# Altium PCB CW308T_STM32FSOCKET.PcbDoc
Units mil, origin at the board's own origin, x right, y up, seen from the top; angles counter-clockwise.
Board outline 2060 x 2540 mil, 2 copper layers (Top Layer, Bottom Layer); 22 components, 36 nets, 190 pads, 135 vias.
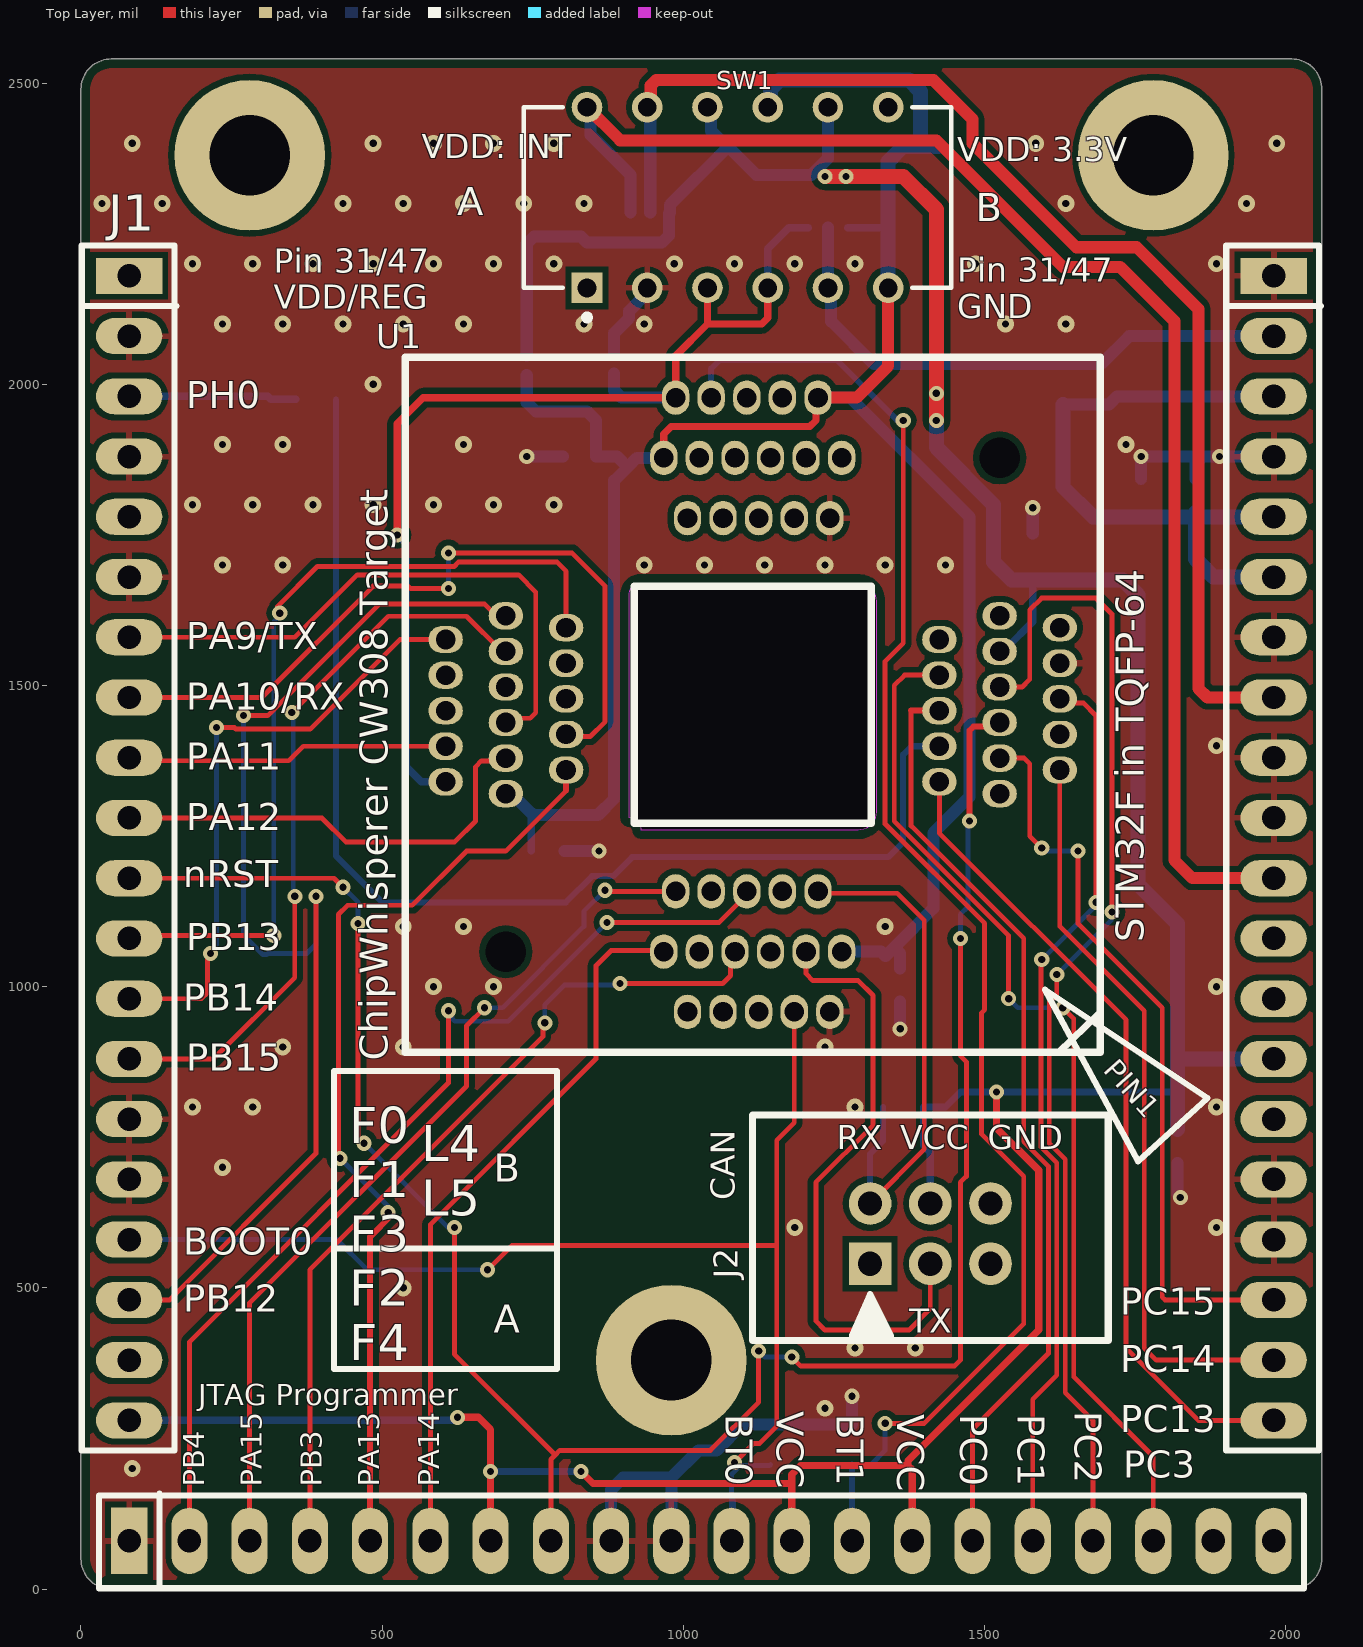
[diagram p0: Top Layer view]
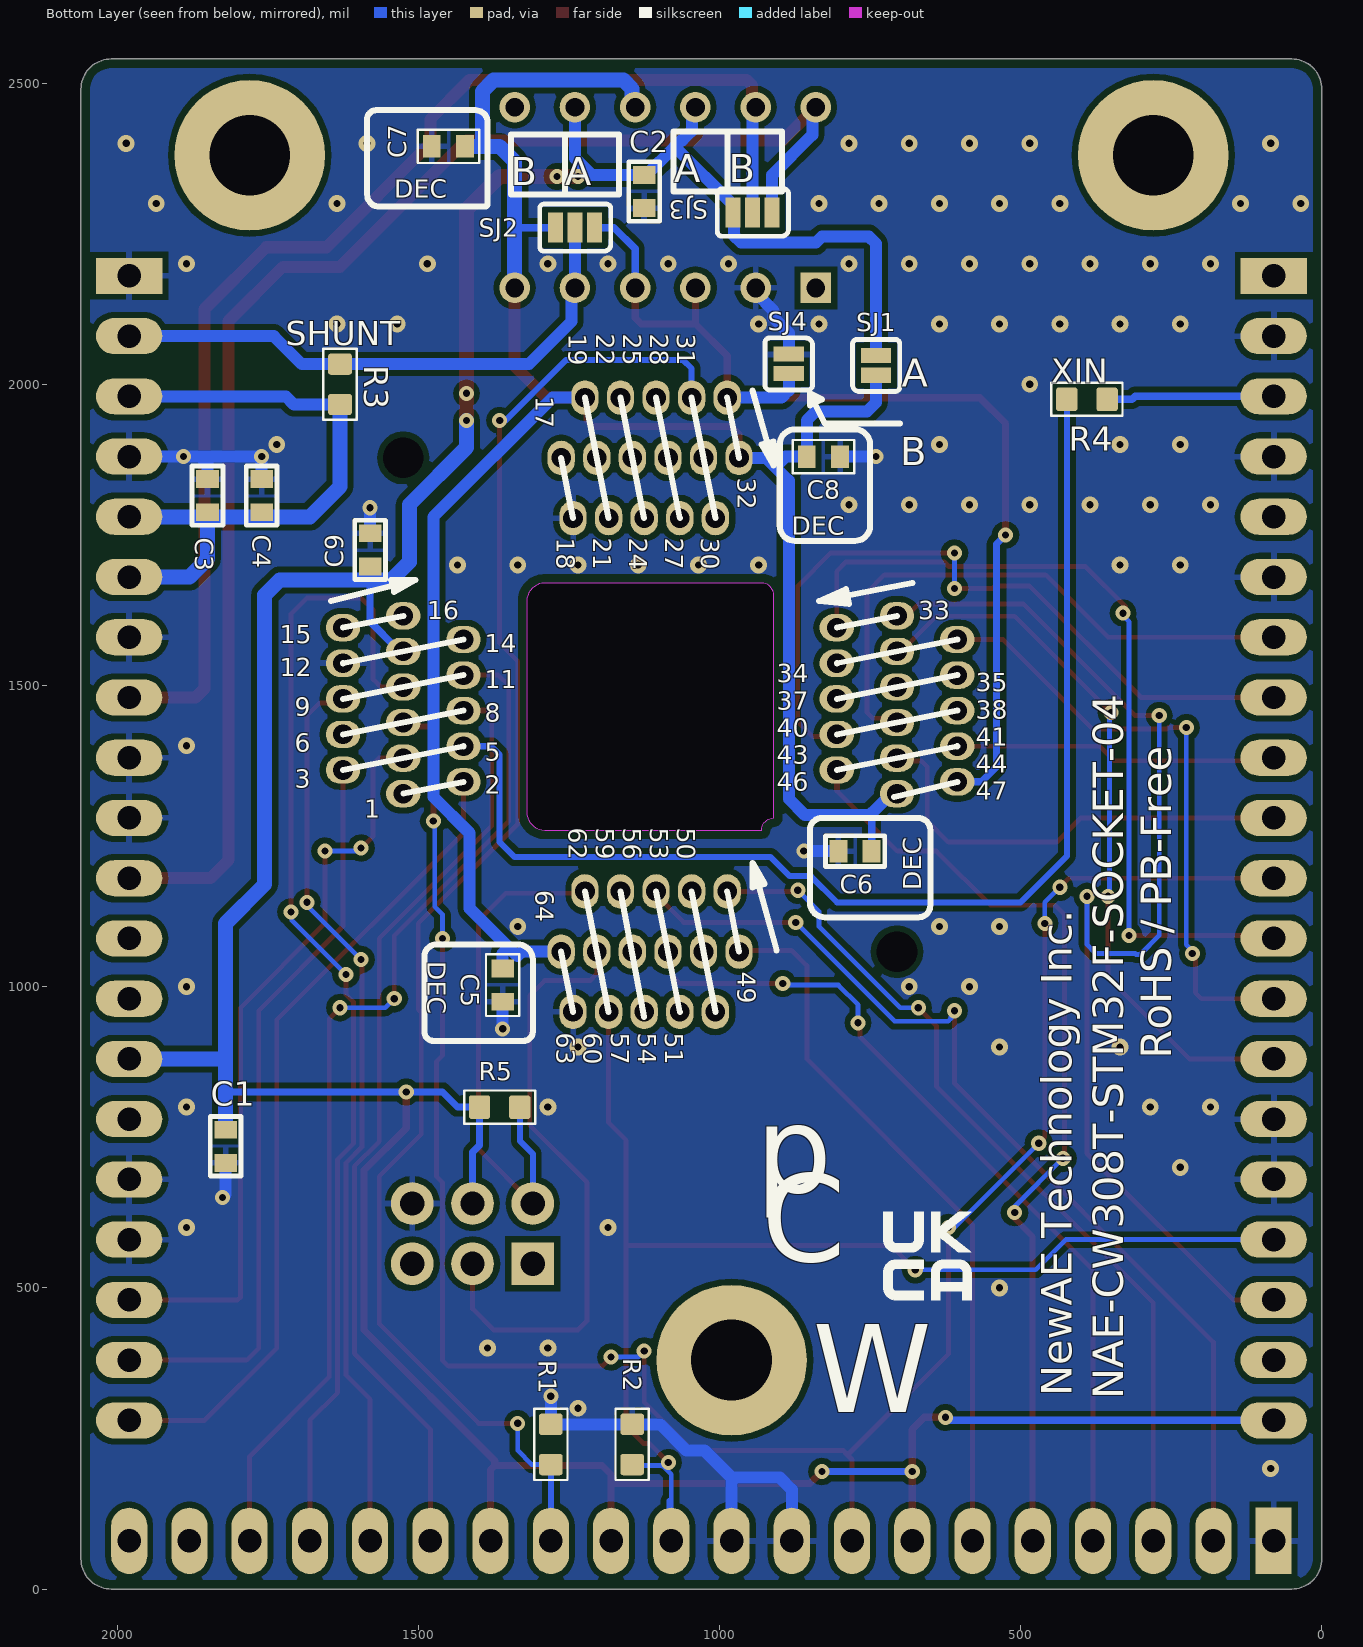
[diagram p1: Bottom Layer view, seen from below]

## Layer stack, top to bottom
Top Solder: solder mask 0.4, Solder Resist, Dk 3.5
Top Layer: signal copper 1.4
Dielectric 1: dielectric 12.6, FR-4, Dk 4.8
Bottom Layer: signal copper 1.4
Bottom Solder: solder mask 0.4, Solder Resist, Dk 3.5

## Board outline
0,50 ccw(c50,50) 50,0 2010,0 ccw(c2010,50) 2060,50 2060,2490 ccw(c2010,2490) 2010,2540 50,2540 ccw(c50,2490) 0,2490
cut-out: 930,1670 1290,1670 cw(c1290,1640) 1320,1640 1320,1290 cw(c1290,1290) 1290,1260 930,1260 ccw(c910,1260) 910,1280 910,1650 cw(c930,1650)

## Design rules (kind name [scope] priority, off if disabled: settings)
BoardOutlineClearance [All] p1: gap=15 ignorepadtopadclearanceinfootprint=FALSE except(0: Arc-SplitContinuation Track-SplitContinuation SMDPad-SplitContinuation THPad-SplitContinuation Via-SplitContinuation Fill-SplitContinuation Poly-SplitContinuation Region-SplitContinuation Text-SplitContinuation)
Clearance Clearance_1 [InPolygon] p1: gap=10 ignorepadtopadclearanceinfootprint=FALSE
Clearance [All] p2: gap=6 ignorepadtopadclearanceinfootprint=FALSE except(0: Arc-Hole Track-Hole SMDPad-Hole THPad-Hole Via-Hole Fill-Hole Poly-Hole Region-Hole Text-Hole)
HoleSize [All] p1: absolutevalues=TRUE maxlimit=200 minlimit=1 maxpercent=80.000 minpercent=20.000
MinimumSolderMaskSliver [All] p1: minsoldermaskwidth=5
PasteMaskExpansion PasteMaskExpansion_SJ [InComponent('SJ2')] p1: expansion=-200 // Disable SJ shorts
PasteMaskExpansion PasteMaskExpansion_TQFP [InComponent('U1')] p2: expansion=-1.5
PasteMaskExpansion [All] p3: expansion=0
PlaneConnect PlaneConnect_viaDirect [IsVia] p1: planeconnectstyle=Direct reliefexpansion=20 reliefentries=4 reliefconductorwidth=10 reliefairgap=10
PlaneConnect [All] p2: planeconnectstyle=Relief reliefexpansion=20 reliefentries=4 reliefconductorwidth=10 reliefairgap=10
PolygonConnect PolygonConnect_viaDirect [All vs isVia] p1: connectstyle=Direct reliefconductorwidth=10 reliefentries=4 polygonreliefangle="90 Angle" airgapwidth=10
PolygonConnect [All] p2: connectstyle=Relief reliefconductorwidth=10 reliefentries=4 polygonreliefangle="90 Angle" airgapwidth=10
RoutingVias [All] p1: holewidth=12 width=25 viastyle="Through Hole" minholewidth=12 minwidth=25 maxholewidth=28 maxwidth=50
SilkToSilkClearance [All] p1: silktosilkclearance=5
SilkToSolderMaskClearance [IsPad] p1: minsilkscreentomaskgap=5 clearancetoexposedcopper=TRUE
SolderMaskExpansion [All] p1: expansion=4 istentingtop=FALSE
Width [All] p1: maxlimit=100 minlimit=6 preferedwidth=8 minimp=50.000000 maximp=50.000000 favimp=50.000000
24 further rules are at their usual default settings.

## Components (designator, comment, footprint, x,y, rotation, side; value= is the part's Value field where it differs from the comment)
C1 "100n" CAPC0603_M 1820,735 r270 bottom
C2 "100n" CAPC0603_M 1125,2320 r270 bottom
C3 "2u2" CAPC0603_M 1850,1815 r90 bottom
C4 "100n" CAPC0603_M 1760,1815 r90 bottom
C5 "DNM" CAPC0603_M 1360,1002.44 r270 bottom
C6 "DNM" CAPC0603_M 775,1225 r0 bottom
C7 "DNM" CAPC0603_M 1450,2395 r0 bottom
C8 "DNM" CAPC0603_M 827.44,1880 r180 bottom
C9 "100n" CAPC0603_M 1580,1725 r90 bottom
J1 "CW308_TARGETCON" CW308_TBOARD_CONN 80,2180 r0 top locked
J2 "HDR" HDR_6PIN_2ROW_SHROUD 1410,590 r90 top
R1 "10k" RESC1608X55N 1280,240 r90 bottom
R2 "10k" RESC1608X55N 1145,240 r90 bottom
R3 "10R" RESC1608X55N 1630,2000 r270 bottom
R4 "51R" RESC1608X55N 390,1975 r180 bottom value=100R
R5 "10k" RESC1608X55N 1365,800 r0 bottom
SJ1 "NO" SJ_2S_NO 740,2031.22 r90 bottom
SJ2 "NC" SJ_3S_NO 1240,2260 r0 bottom
SJ3 "NC" SJ_3S_NO 945,2285 r0 bottom
SJ4 "NO" SJ_2S_NO 885,2033.78 r270 bottom
SW1 "ASE4204" FP-ASE4204-MFG 1090,2310 r90 top locked
U1 "3014-64-X-08" 3014-64-X-08 1115.16,1467.95 r180 top locked

## Footprints (in the part's own frame and the unit in brackets; to place one, negate y for a bottom-side part, rotate by r counter-clockwise, add the part's x,y. Pads: shape width x height; smd on the part's side, far side on the other; paste and mask are expansions set on the pad)
3014-64-X-08 [mm]
  oval 1.45x1.15 hole 0.83: 1(-10.41,3.75) 2(-7.87,3.25) 3(-12.95,2.75) 4(-10.41,2.25) 5(-7.87,1.75) 6(-12.95,1.25) 7(-10.41,0.75) 8(-7.87,0.25) 9(-12.95,-0.25) 10(-10.41,-0.75) 11(-7.87,-1.25) 12(-12.95,-1.75) 13(-10.41,-2.25) 14(-7.87,-2.75) 15(-12.95,-3.25) 16(-10.41,-3.75) 33(10.41,-3.75) 34(7.87,-3.25) 35(12.95,-2.75) 36(10.41,-2.25) 37(7.87,-1.75) 38(12.95,-1.25) 39(10.41,-0.75) 40(7.87,-0.25) 41(12.95,0.25) 42(10.41,0.75) 43(7.87,1.25) 44(12.95,1.75) 45(10.41,2.25) 46(7.87,2.75) 47(12.95,3.25) 48(10.41,3.75)
  oval 1.15x1.45 hole 0.83: 17(-3.75,-10.41) 18(-3.25,-7.87) 19(-2.75,-12.95) 20(-2.25,-10.41) 21(-1.75,-7.87) 22(-1.25,-12.95) 23(-0.75,-10.41) 24(-0.25,-7.87) 25(0.25,-12.95) 26(0.75,-10.41) 27(1.25,-7.87) 28(1.75,-12.95) 29(2.25,-10.41) 30(2.75,-7.87) 31(3.25,-12.95) 32(3.75,-10.41) 49(3.75,10.41) 50(3.25,7.87) 51(2.75,12.95) 52(2.25,10.41) 53(1.75,7.87) 54(1.25,12.95) 55(0.75,10.41) 56(0.25,7.87) 57(-0.25,12.95) 58(-0.75,10.41) 59(-1.25,7.87) 60(-1.75,12.95) 61(-2.25,10.41) 62(-2.75,7.87) 63(-3.25,12.95) 64(-3.75,10.41)
  round 1.27 hole 1.71 unplated: MH1(-10.41,-10.41) MH2(10.41,10.41)
  silkscreen extent -14.65,-14.65 14.65,14.66
CAPC0603_M [mm]
  rect 0.75x0.95 smd: 1(-0.7,0) 2(0.7,0)
  silkscreen extent -1.25,-0.65 1.25,0.65, body extent -0.85,-0.45 0.85,0.45, height 0.9
CW308_TBOARD_CONN [mil]
  rect 110x60 hole 39: A1(0,0) C1(1900,0)
  oval 110x60 hole 39: A2(0,-100) A3(0,-200) A4(0,-300) A5(0,-400) A6(0,-500) A7(0,-600) A8(0,-700) A9(0,-800) A10(0,-900) A11(0,-1000) A12(0,-1100) A13(0,-1200) A14(0,-1300) A15(0,-1400) A16(0,-1500) A17(0,-1600) A18(0,-1700) A19(0,-1800) A20(0,-1900) C2(1900,-100) C3(1900,-200) C4(1900,-300) C5(1900,-400) C6(1900,-500) C7(1900,-600) C8(1900,-700) C9(1900,-800) C10(1900,-900) C11(1900,-1000) C12(1900,-1100) C13(1900,-1200) C14(1900,-1300) C15(1900,-1400) C16(1900,-1500) C17(1900,-1600) C18(1900,-1700) C19(1900,-1800) C20(1900,-1900)
  rect 60x110 hole 39: B1(0,-2100)
  oval 60x110 hole 39: B2(100,-2100) B3(200,-2100) B4(300,-2100) B5(400,-2100) B6(500,-2100) B7(600,-2100) B8(700,-2100) B9(800,-2100) B10(900,-2100) B11(1000,-2100) B12(1100,-2100) B13(1200,-2100) B14(1300,-2100) B15(1400,-2100) B16(1500,-2100) B17(1600,-2100) B18(1700,-2100) B19(1800,-2100) B20(1900,-2100)
  round 250 hole 134: MH1(200,200) MH2(900,-1800) MH2(1700,200)
  silkscreen extent -79,-2179 1979,50, body extent -50,-2149 1950,50, height 48
FP-ASE4204-MFG [mm]
  rect 1.29x1.29 hole 0.79 paste-1000 mask+0: 1(-3.81,6.35)
  round 1.29 hole 0.79 paste-1000 mask+0: 2(-3.81,3.81) 3(-3.81,1.27) 4(-3.81,-1.27) 5(-3.81,-3.81) 6(-3.81,-6.35) 7(3.81,-6.35) 8(3.81,-3.81) 9(3.81,-1.27) 10(3.81,1.27) 11(3.81,3.81) 12(3.81,6.35)
  silkscreen extent -5.18,-9.02 3.8,9.02, body extent -4.55,-9.12 4.55,9.12, height 0.25
HDR_6PIN_2ROW_SHROUD [mm] "6-pin header, male, with shroud"
  rect 1.8x1.8 hole 1.02: 1(-1.27,2.54)
  round 1.8 hole 1.02: 2(1.27,2.54) 3(-1.27,0) 4(1.27,0) 5(-1.27,-2.54) 6(1.27,-2.54)
  silkscreen extent -4.5,-7.5 5,7.5, body extent -4.44,-7.41 4.83,7.42, height 9.32
RESC1608X55N [mm] "Chip Resistor, Body 1.6x0.8mm, EIA 0603, IPC Medium Density"
  round 0.254 on Mech15: 0(0,0)
  rrect25% 0.9x1 smd: 1(-0.85,0) 2(0.85,0)
  Top Layer pour cut-out: -0.6,0.5 -0.4,0.7 0.4,0.7 0.6,0.5 0.6,-0.5 0.4,-0.7 -0.4,-0.7 -0.6,-0.5
  silkscreen extent -1.5,-0.7 1.5,0.7, body extent -0.87,-0.47 0.88,0.48, height 0.54
SJ_2S_NO [mil] "Solder Jumper, open (no paste)"
  rect 25x50 smd paste-393.7: 1(-16.22,0) 2(16.22,0)
  silkscreen extent -43,-39 43,39
SJ_3S_NO [mil] "3-Way Solder Jumper,  no pads"
  rect 25x50 smd paste-787.4: 1(-32.43,0) 2(0,0)
  rect 25x50 smd paste-393.7: 3(32.44,0)
  silkscreen extent -60,-39 59,39

## Part data
C1 C2 C4 C9: library part CCHIP-100n-0603, "100n, 0603", Case-EIA=0603, Case-Metric=1608, Component Group=Capacitor, Component Type=Standard, Mounting Technology=SMT, Part Number=CCHIP-100n-0603, Pin Count=2
C3: library part CCHIP-2u2-0603, "2u2, 0603", Case-EIA=0603, Case-Metric=1608, Component Group=Capacitor, Component Type=Standard, Mounting Technology=SMT, Part Number=CCHIP-2u2-0603, Pin Count=2
C5 C6 C7 C8: library part CCHIP-DNM-0603, "DNM, 0603", Case-EIA=0603, Component Group=Capacitor, Component Type=Standard, Mounting Technology=SMT, Part Number=CCHIP-DNM-0603, Pin Count=2
J1: library part CW308_TBOARD, "CW308 \"Standard\" Target Board Connector", Component Group=Mechanical, Component Type=Standard, Mounting Technology=Through-hole, Part Number=CW308_TBOARD, Pin Count=60, Pitch=2.54mm
J2: library part HDR_6PIN_2ROW_SHROUD, "HDR, Male, 6-Pin, 2 Row, Shrouded", Manufacture 1="FCI Connectors", Manufacture Part Number 1=75869-131LF, Supplier Part Number 1=609-2845-ND, Component Group=Connector, Component Type=Standard, Mounting Technology=Through-hole, Part Number=HDR_6PIN_2ROW_SHROUD, Pin Count=6, RoHS=Yes, Supplier 1=Digi-Key
R1 R2 R5: library part RCHIP-10K-0603, "10k res, 0603, 1%, 1/10W", Case-EIA=0603, Case-Metric=1608, Manufacture 1=Yageo, Manufacture Part Number 1=RC0603FR-0710KL, Rated Power=0.1W, Rated Voltage=75VDC, Supplier Part Number 1=311-10.0KHRCT-ND, Temperature Range="-55C to 155C", Tolerance=1%, Component Group=Resistor, Component Type=Standard, Mounting Technology=SMT, Part Number=RCHIP-10K-0603, Pin Count=2, Supplier 1=Digi-Key
R3: library part RCHIP-10R-0603, "10R res, 0603, 1%, 1/10W", Case-EIA=0603, Case-Metric=1608, Manufacture 1=Yageo, Manufacture Part Number 1=RC0603FR-0710RL, Rated Power=0.1W, Rated Voltage=75VDC, Supplier Part Number 1=311-10.0HRCT-ND, Temperature Range="-55C to 155C", Tolerance=1%, Component Group=Resistor, Component Type=Standard, Mounting Technology=SMT, Part Number=RCHIP-10R-0603, Pin Count=2, Supplier 1=Digi-Key
R4: library part RCHIP-100R-0603, "100R res, 0603, 1%, 1/10W", Case-EIA=0603, Case-Metric=1608, Manufacture 1=Yageo, Manufacture Part Number 1=RC0603FR-07100RL, Rated Power=0.1W, Rated Voltage=75VDC, Supplier Part Number 1=311-100HRCT-ND, Temperature Range="-55C to 155C", Tolerance=1%, Component Group=Resistor, Component Type=Standard, Mounting Technology=SMT, Part Number=RCHIP-100R-0603, Pin Count=2, Supplier 1=Digi-Key
SJ1 SJ4: library part SJ_2S_NO, "Solder Jumper, NO", Component Group="PCB Feature", Component Type="Standard (No BOM)", Mounting Technology=COPPER, Part Number=SJ_2S_NO, Pin Count=2
SJ2 SJ3: library part SJ_3S_12JMP, "Solder Jumper, NC", Component Group="PCB Feature", Component Type="Standard (No BOM)", Mounting Technology=COPPER, Part Number=SJ_3S_12JMP, Pin Count=3
SW1: library part CMP-03405-000007-1, "Pushbutton Switch SPST-NO Keyswitch, Illuminated Through Hole", Actuator Color=Natural, Contact Current Rating=300mA, Contact Resistance=40mR, Flammability Rating="UL94 V-0", Max Operating Temperature=80°C, Max Voltage Rating (DC)=115V, Min Operating Temperature=-40°C, Actuator Material=Polyester, Actuator Type=SLIDE, Color=Natural, Contact Material="Copper Alloy", Contact Plating=Silver, Current Rating=300mA, Electrical Life=15000Cycles, Lead Free="Lead Free", Mount="Through Hole", Number of Poles=4, Number of Positions=2, Orientation=Vertical, Packaging=Rail/Tube, REACH SVHC="No SVHC", RoHS Compliant=Yes, Termination=Solder, Throw Configuration=4PDT, Voltage Rating (AC)=115V
U1: library part TQFP64_SOCKET

## Via types
v1: diameter 28, hole 12, Top Layer to Bottom Layer, tented both sides, 80 vias
v2: diameter 25, hole 12, Top Layer to Bottom Layer, tented both sides, 55 vias

## Nets (pads, with @x,y where several pads share a name; then routed paths per layer and width w, separated by ;. In a path a pad name is that pad's centre, name@x,y a point inside that pad or via, vN(x,y) a via of type N, cw(c..) or ccw(c..) an arc to the next point about the centre after c; other vN are vias at no path point)
BOOT0: J1.A17 J1.B11 R2.1 U1.60 | length 2169.8
  Top Layer w8: v2(675,530) 715,570 1155,570 ; v2(1085,210) 1116.63,241.63 1126.63,241.63 1155,270 1155,570 ; U1.60 1184.06,774.06 1155,745 1155,570
  Bottom Layer w8: J1.A17 425,580 475,530 v2(675,530) ; 1083.73,147.23 1083.73,83.73 J1.B11 1080,83.73 1080,147.23 1080,190.4 v2@1090,200.4 ; v2(1085,210) 1085,205.4 v2@1090,200.4 ; R2.1 1143.46,205 1094.6,205 v2@1090,200.4
BOOT1: J1.B13 R1.1 U1.28 | length 2560.8
  Top Layer w8: v2(1335,275) 1400,275 1565,440 1565,685 1495,755 1495,956.59 1500,961.59 1500,1105 1335,1270 1335,1540 1365,1570 v2(1365,1940)
  Bottom Layer w8: R1.1 1311.54,206.54 1335,230 v2(1335,275)
  Bottom Layer w10: U1.28 1046.26,2026.26 1060,2040 1255,2040 1355,1940 v2(1365,1940) ; J1.B13 R1.1
CAN_RX: J2.2 R5.1 U1.62 | length 872.7
  Top Layer w8: U1.62 1226.54,1155 1355,1155 1400,1110 1400,730 J2.2
  Bottom Layer w10: J2.2 1310,722.31 1331.54,743.84 R5.1
CAN_TX: J2.3 U1.61 | length 1028.4
  Top Layer w8: U1.61 1203.74,1021.26 1215,1010 1290.31,1010 1315,985.31 1315,770 1220,675 1220,445 1235,430 1375,430 1410,465 J2.3
CLKI: R4.1 U1.5 | length 1983.9
  Bottom Layer w10: R4.1 423.46,1216.54 500,1140 805,1140 848.5,1183.5 883.5,1183.5 915,1215 1340,1215 1365,1240 1365,1385 1379.06,1399.06 U1.5
CLKO: U1.6
CS: J1.A18 U1.33 | length 1942.7
  Top Layer w8: J1.A18 147,480 390,723 v2(390,1150) ; v2(270,1450) 310,1450 495,1635 669.91,1635 689.32,1615.59 U1.33
  Bottom Layer w8: v2(270,1450) 270,1085 301.69,1053.31 308.31,1053.31 310,1055 375,1055 390,1070 v2(390,1150)
GND: C1.2 C2.2 C3.2 C4.2 C5.2 C6.2 C7.2 C8.2 C9.2 J1.A2 J1.A4 J1.A6 J1.A15 J1.A16 J1.B1 J1.B9 J1.B10 J1.C1 J1.C4 J1.C7 J1.C9 J1.C10 J1.C16 J1.C17 J2.6 R1.2 R2.2 SJ4.1 SW1.2 U1.12 U1.18 U1.63 | length 1378.1
  Bottom Layer w20: v2(740,1880) C8.2 ; C6.2 v2(860,1225) ; J1.B9 880,165 900,185 980,185 ; SJ4.1 885,2085 910,2110 910,2121.67 940,2151.67 SW1.2 ; J1.B10 980,185 ; v2(1280,320) R1.2 R2.2 1098.46,273.46 1055,230 1025,230 980,185 ; v2(1360,930) C5.2 ; C9.2 v2(1580,1795) ; C4.2 v2(1760,1880) 1861.72,1880 ; C1.2 1820,655 v2(1825,650) ; C3.2 1850,1868.28 1861.72,1880 ; J1.C4 v2(1890,1880) 1861.72,1880
  other v1: 85,200 1235,300 1285,400 1385,400 535,500 1185,600 1885,600 235,700 185,800 285,800 1285,800 1885,800 335,900 535,900 1235,900 585,1000 685,1000 1885,1000 535,1100 635,1100 1335,1100 1885,1400 235,1700 335,1700 935,1700 1035,1700 1135,1700 1235,1700 1335,1700 1435,1700 185,1800 285,1800 385,1800 485,1800 585,1800 685,1800 785,1800 235,1900 335,1900 635,1900 1735,1900 485,2000 235,2100 335,2100 435,2100 535,2100 635,2100 835,2100 935,2100 1535,2100 1635,2100 185,2200 285,2200 385,2200 485,2200 585,2200 685,2200 785,2200 985,2200 1085,2200 1185,2200 1285,2200 1485,2200 1885,2200 35,2300 135,2300 435,2300 535,2300 635,2300 735,2300 835,2300 1635,2300 1935,2300 85,2400 485,2400 585,2400 685,2400 785,2400 1585,2400 1985,2400
GPIO3: J1.A9 U1.44 | length 537.4
  Top Layer w8: J1.A9 85,1375 345,1375 369.06,1399.06 U1.44
GPIO4: J1.A10 U1.45 | length 752.3
  Top Layer w8: J1.A10 400,1280 440,1240 620,1240 655,1275 655,1365 664.77,1374.77 700.72,1374.77 U1.45
LED1: J1.C18 U1.4 | length 1249.5
  Top Layer w8: U1.4 1565.63,1379.37 1575,1370 1575,1250 v2(1595,1230) ; v2(1655,1225) 1655,1105 1795,965 1795,484.69 1799.69,480 J1.C18
  Bottom Layer w8: v2(1595,1230) 1600,1225 v2(1655,1225)
LED2: J1.C19 U1.3 | length 1241
  Top Layer w8: U1.3 1625,1100 1765,960 1765,400 1785,380 J1.C19
LED3: J1.C20 U1.2 | length 1363.1
  Top Layer w8: U1.2 1425,1255 1735,945 1735,400 1855,280 J1.C20
MISO: J1.A13 U1.35 | length 1023.3
  Top Layer w8: J1.A13 200,980 210,990 210,1050 v2(215,1055) ; v2(225,1430) 254.84,1430 257.34,1427.5 380.49,1427.5 529.21,1576.22 U1.35
  Bottom Layer w8: v2(215,1055) 215,1059.6 225,1069.6 v2(225,1430)
MOSI: J1.A14 U1.36 | length 1218.8
  Top Layer w8: J1.A14 220,880 355,1015 v2(355,1150) ; v2(350,1455) 510,1615 640,1615 698.46,1556.54 U1.36
  Bottom Layer w8: v2(350,1455) 352.5,1452.5 352.5,1152.5 v2(355,1150)
NetC3_1: C3.1 C4.1 J1.C3 J1.C5 J1.C6 R3.2 | length 1082.7
  Bottom Layer w20: R3.2 1706.54,1966.54 1720,1980 J1.C3
  Bottom Layer w25: R3.2 1630,1830 1680,1780 C3.1@1850,1780 ; C3.1 C3.1@1850,1780 ; J1.C6 1880,1680 1850,1710 C3.1@1850,1780 ; J1.C5 C3.1@1850,1780
NetJ1_A3: J1.A3 R4.2 | length 278.6
  Bottom Layer w12: J1.A3 310,1980 315,1975 R4.2
NetJ1_C2: J1.C2 R3.1 SJ2.2 SW1.5 | length 941
  Bottom Layer w20: SJ2.2 SW1.5 1245.39,2154.61 1245.39,2104.61 1316.54,2033.46 R3.1 1693.46,2033.46 1740,2080 J1.C2
NetJ1_C8: J1.C8 SJ3.2 SW1.11 | length 2070.3
  Top Layer w20: SW1.11 945.89,2465.89 945.89,2495.89 955,2505 1415,2505 1480,2440 1480,2400 1652.5,2227.5 1752.5,2227.5 1855,2125 1855,1495 1870,1480 J1.C8
  Bottom Layer w20: SW1.11 945,2455 SJ3.2
NetJ1_C11: J1.C11 SJ3.1 SW1.12 | length 2407.9
  Top Layer w20: SW1.12 895,2405 1420,2405 1630,2195 1725,2195 1815,2105 1815,1210 1845,1180 J1.C11
  Bottom Layer w20: SW1.12@845.89,2465.89 SW1.12 845.89,2454.11 845.89,2414.11 912.57,2347.43 SJ3.1
nRST: J1.A11 J1.B8 U1.7 | length 3524.6
  Top Layer w8: J1.A11 420,1180 v2(435,1165) ; v2(460,1105) 460,750 v2(470,740) ; v2(620,600) 620,390 787.5,222.5 ; J1.B8 780,215 787.5,222.5 ; v2(1125,395) 1125,310 1045,230 795,230 787.5,222.5 ; v2(1180,385) 1195,370 1450,370 1460,380 1460,675 1470,685 1470,875.2 1460,885.2 v2(1460,1080)
  Top Layer w10: v2(1475.15,1274.85) 1475,1275 1475,1425 1481.68,1431.68 1518.25,1431.68 U1.7
  Bottom Layer w8: v2(435,1165) 460,1140 v2(460,1105) ; v2(470,740) 610,600 v2(620,600) ; v2(1125,395) 1135,385 v2(1180,385) ; v2(1460,1080) 1460,1120.01 1472.58,1132.59 1472.58,1272.27 v2(1475.15,1274.85)
PC0: J1.B15 U1.8 | length 1571.6
  Top Layer w8: 1378.11,1458.11 1378.11,1266.89 1565,1080 1565,742.63 1606,701.63 1606,391 1480,265 J1.B15
  Top Layer w10: 1378.11,1458.11 U1.8
PC1: J1.B16 U1.9 | length 1507
  Top Layer w8: J1.B16 1580,314.76 1620,354.76 1620,707.43 1593.5,733.93 1593.5,1043.5 v2(1595,1045) ; U1.9 1632.13,1470.66 1664.34,1470.66 1685,1450 v2(1685,1140)
  Bottom Layer w8: v2(1595,1045) 1685,1135 v2(1685,1140)
PC2: J1.B17 U1.10 | length 1937.8
  Top Layer w8: U1.10 1562.48,1497.48 1575,1510 1575,1625.31 1594.69,1645 1685,1645 1711.58,1618.42 v2(1711.58,1124.05) ; v2(1620,1020) 1620,986.82 1607.5,974.32 1607.5,739.73 1634,713.23 1634,326 1680,280 J1.B17
  Bottom Layer w8: v2(1620,1020) 1710,1110 1710,1122.47 v2(1711.58,1124.05)
PC3: J1.B18 U1.11 | length 1724.2
  Top Layer w8: U1.11 1367.17,1517.17 1350,1500 1350,1274.8 1540,1084.8 v2(1540,980) ; v2(1630,965) 1648,947 1648,352 1780,220 J1.B18
  Bottom Layer w8: v2(1540,980) 1555,965 v2(1630,965)
RX: J1.A8 U1.43 | length 1251.7
  Top Layer w8: J1.A8 300,1480 485,1665 543.2,1665 547.2,1661 v2(610,1661) ; v2(610,1720) 815,1720 870,1665 870,1440 845,1415 809.06,1415 U1.43
  Bottom Layer w8: v2(610,1661) v2(610,1720)
SCK: J1.A12 U1.34 | length 1404.1
  Top Layer w8: J1.A12 85,1085 v2(320,1085) ; v2(330,1620) 326.75,1623.25 326.75,1629.88 325.81,1630.81 392.5,1697.5 619.32,1697.5 626.82,1705 790,1705 805.32,1689.68 U1.34
  Bottom Layer w8: v2(320,1085) 320,1605.4 330,1615.4 v2(330,1620)
TCK: J1.B6 U1.49 | length 1192.6
  Top Layer w8: J1.B6 580,605 855,880 855,1035 880,1060 965.63,1060 U1.49
TDI: J1.B3 U1.50 | length 1456.1
  Top Layer w8: J1.B3 280,475 640,835 640,935 v2(670,965) ; v2@873.11,1158.11 U1.50
  Bottom Layer w8: v2(670,965) 700,965 835,1100 835,1125 v2(870,1160)
TDO: J1.B4 U1.55 | length 1422.7
  Top Layer w8: J1.B4 380,530 766.75,916.75 766.75,936.75 v2(770,940) ; v2(895,1005) 1065,1005 1078.5,1018.5 1078.5,1050.98 U1.55
  Bottom Layer w8: v2(770,940) 770,970 802.5,1002.5 892.5,1002.5 v2(895,1005)
TMS: J1.B5 U1.46 | length 1580.9
  Top Layer w8: v2(430,715) 427.5,717.5 427.5,1120 442.5,1135 550,1135 640,1225 705,1225 805.32,1325.32
  Top Layer w10: J1.B5 480,585 v2@515,620 ; 805.32,1325.32 U1.46
  Bottom Layer w8: v2(430,715) 510,635 v2(510,625)
TRST: J1.B2 U1.56 | length 1657.5
  Top Layer w8: J1.B2 180,410 610,840 v2(610,960) ; v2(873.41,1106.59) 1059.7,1106.59 1105.32,1152.2 U1.56
  Bottom Layer w8: v2(610,960) 610,955.4 615.83,949.57 615.83,947.19 620.52,942.5 709.32,942.5 v2(873.41,1106.59)
TX: J1.A7 U1.42 | length 986.2
  Top Layer w8: J1.A7 355,1580 458.5,1683.5 726.5,1683.5 755,1655 755,1455 745.56,1445.56 712.45,1445.56 U1.42
VCAP: SJ2.1 SJ4.2 SW1.3 SW1.4 U1.31 U1.47 | length 1771.9
  Top Layer w12: v2(525,1750) 525,1935 567.8,1977.8 U1.31 987.2,2047.2 1040,2100 ; SW1.3 1040,2100 ; SW1.4 1140,2110 1130,2100 1040,2100
  Bottom Layer w12: v2(525,1750) 540,1735 540,1365 565,1340 U1.47 ; SW1.4 1140,2225 1175,2260 SJ2.1
  Bottom Layer w20: SJ4.2 885,1990 897.2,1977.8 U1.31
VCC: C1.1 C2.1 C9.1 J1.A20 J1.B7 J1.B12 J1.B14 J1.C14 J2.4 R5.2 SJ1.2 SJ3.3 SW1.8 SW1.10 U1.13 | length 6389.8
  Top Layer w12: v2(625,285) 660,285 680,265 v2(680,195) J1.B7 ; v2(830,195) 850,175 1180,175 ; J1.B12 1180,175 ; J1.B14 1380,197.97 1372.97,205 ; v2(1520,825) 1520,765 1590,695 1590,430 1372.97,212.97 1372.97,205 ; 1180,175 1180,190 1195,205 1372.97,205
  Top Layer w25: v2(1235,2345) v2(1270,2345) 1365,2345 1420,2290 v2(1420,1985) v2(1420,1940)
  Bottom Layer w12: J1.A20 620,280 v2(625,285) ; v2(680,195) v2(830,195) ; J2.4 1410,725 1398.46,736.54 R5.2 1435,800 1460,825 v2(1520,825) 1816.28,825 1820,821.28 ; U1.13 1536.54,1556.54 1536.54,1562.17 1580,1605.63 1580,1675
  Bottom Layer w20: SJ1.2 740,2233.28 751.72,2245 830,2245 840,2235 964.09,2235 975.8,2246.72 975.8,2283.36 SJ3.3 977.44,2297.5 1074.26,2394.31 1074.31,2394.31 ; SW1.10 1045.89,2454.11 1045.89,2420.82 1061.72,2405 1063.62,2405 1074.31,2394.31 ; SW1.8@1240,2468.33 SW1.8 1240,2375 1212.56,2347.56 C2.1 1121.06,2347.56 1074.31,2394.31
  Bottom Layer w25: v2(1420,1940) 1420,1895 1515,1800 1515,1705 1545,1675 1580,1675 1730,1675 1755,1650 1755,1170 1820,1105 1820,880 ; C1.1 1820,821.28 1820,880 ; J1.C14 1820,880
VEE: C5.1 C6.1 C7.1 C8.1 SJ1.1 SJ2.3 SW1.6 SW1.9 U1.19 U1.32 U1.48 U1.64 | length 3795.6
  Top Layer w12: U1.32 967.52,1917.52 980,1930 1210,1930 1220,1940 1220,1974.37 U1.19
  Top Layer w20: U1.19 1287.8,1977.8 1340,2030 SW1.6
  Bottom Layer w12: C6.1 747.44,1287.91 ; U1.32@967.52,1871.89 U1.32 ; SJ2.3 1340,2260
  Bottom Layer w20: U1.48 715.03,1320.32 747.44,1287.91 750.35,1285 858.28,1285 885,1311.72 885,1840 907.5,1862.5 ; SJ1.1 740,1970 755,1955 840,1955 855,1940 C8.1 890,1880 907.5,1862.5 ; U1.32 922.8,1877.8 907.5,1862.5 ; U1.19 1277.2,1977.8 1475,1780 1475,1315 1415,1255 1415,1130 1352.5,1067.5 ; U1.64 1327.95,1058.11 1335.53,1050.53 1352.5,1067.5 ; C5.1 1360,1055 1352.5,1062.5 1352.5,1067.5
  Bottom Layer w25: SW1.9 1144.93,2464.93 1144.93,2490.36 1159.58,2505 1375,2505 1393.72,2486.28 1393.72,2395 ; SW1.6 1340,2260 1340,2370 1365,2395 1393.72,2395 ; C7.1 1393.72,2395
pads on no net: J1.A1 J1.A5 J1.A19 J1.B19 J1.B20 J1.C12 J1.C13 J1.C15 J1.MH1 J1.MH2 J2.1 J2.5 R1.0 R2.0 R3.0 R4.0 R5.0 SW1.1 SW1.7 U1.1 U1.14 U1.15 U1.16 U1.17 U1.20 U1.21 U1.22 U1.23 U1.24 U1.25 U1.26 U1.27 U1.29 U1.30 U1.37 U1.38 U1.39 U1.40 U1.41 U1.51 U1.52 U1.53 U1.54 U1.57 U1.58 U1.59 U1.MH1 U1.MH2

## Polygon pours and split planes (outlines as drawn)
GND on Bottom Layer "GNDBOT" (solid, remove dead copper, pour order 0): -35,2580 -75,2540 -75,-70 2095,-70 2175,10 2175,2675
GND on Top Layer "Top Layer-GND" (solid, remove dead copper, pour order 2): -30,2660 -10,2640 2100,2640 2100,-25 2120,-45 2100,-65 -50,-65

## Silkscreen, mask and mechanical layers (free items; w line width, h text height)
Top Overlay:
  lines w10: 420,565 790,565 ; 1315,450 1305,430 1320,435 1315,460 1292,425 1325,430 1310,490 ; 1310,490 1310,470 1290,420 1335,425 1310,490 ; 1310,490 1345,420 1280,420 1310,490 ; 420,365 420,860 790,860 790,365 420,365 ; 1600,995 1870,815 1755,710 1600,995
  text "VDD: INT" at 566.05,2375 h40
  text "VDD: 3.3V" at 1455,2370 h40
  text "A" at 625,2265 h80
  text "B" at 1485,2255 h80
  text "Pin 31/47 / VDD/REG" at 320,2125 h40
  text "Pin 31/47 / GND" at 1455,2110 h40
  text "PH0" at 175,1960 h45
  text "PA9/TX" at 175,1560 h45
  text "PA10/RX" at 175,1460 h45
  text "PA11" at 175,1360 h45
  text "PA12" at 175,1260 h45
  text "nRST" at 170,1165 h45
  text "STM32F in TQFP-64" at 1780,1073.58 h80 r90
  text "PB13" at 175,1060 h45
  text "PB14" at 170,960 h45
  text "ChipWhisperer CW308 Target" at 525,876.7 h80 r90
  text "PB15" at 175,860 h45
  text "PIN1" at 1695,860 h35 r311.73
  text "RX" at 1255,730 h40
  text "VCC" at 1360,730 h40
  text "GND" at 1505,730 h40
  text "B" at 685,660 h80
  text "CAN" at 1085,645 h40 r90
  text "L4 / L5" at 565,620 h60
  text "BOOT0" at 170,555 h45
  text "PB12" at 170,460 h45
  text "PC15" at 1725,455 h45
  text "TX" at 1375,425 h40
  text "A" at 685,410 h80
  text "F0 / F1 / F3 / F2 / F4" at 445,380 h60
  text "PC14" at 1725,360 h45
  text "JTAG Programmer" at 195,305 h35
  text "VCC" at 1155,295 h45 r270
  text "PC2" at 1650,295 h45 r270
  text "BT0" at 1070,290 h45 r270
  text "BT1" at 1255,290 h45 r270
  text "VCC" at 1355,290 h45 r270
  text "PC0" at 1460,290 h45 r270
  text "PC1" at 1555,290 h45 r270
  text "PC13" at 1725,260 h45
  text "PC3" at 1730,185 h45
  text "PB4" at 205,170 h35 r90
  text "PA15" at 300,170 h35 r90
  text "PB3" at 400,170 h35 r90
  text "PA13" at 495,170 h35 r90
  text "PA14" at 595,170 h35 r90
Bottom Overlay:
  drawing of 101 lines, arcs and shapes, not listed
  text "B" at 985,2320 h80
  text "A" at 1075,2320 h80
  text "A" at 1256.47,2315 h80
  text "B" at 1346.47,2315 h80
  text "DEC" at 1540,2310 h30
  text "31 / 28 / 25 / 22 / 19" at 1250,2083.61 h30 r90
  text "SHUNT" at 1720,2065 h40
  text "XIN" at 449.06,2002.56 h40
  text "A" at 697.42,1980.28 h80
  text "17" at 1305.1,1979.77 h30 r90
  text "B" at 700,1850 h80
  text "32" at 970,1845 h30 r90
  text "DEC" at 880,1750 h30
  text "30" at 1030,1745 h30 r90
  text "27" at 1090,1745 h30 r90
  text "24" at 1150,1745 h30 r90
  text "21" at 1210,1745 h30 r90
  text "18" at 1270,1745 h30 r90
  text "33" at 670,1610 h30
  text "16" at 1485,1610 h30
  text "15" at 1730,1570 h30
  text "14" at 1390,1555 h30
  text "12" at 1730,1515 h30
  text "11" at 1390,1495 h30
  text "9" at 1705,1450 h30
  text "8" at 1390,1440 h30
  text "6" at 1705,1390 h30
  text "5" at 1390,1375 h30
  text "3" at 1705,1330 h30
  text "34 / 37 / 40 / 43 / 46" at 905,1325 h30
  text "2" at 1390,1320 h30
  text "35 / 38 / 41 / 44 / 47" at 575,1310 h30
  text "1" at 1590,1280 h30
  text "50 / 53 / 56 / 59 / 62" at 1250,1263.61 h30 r90
  text "DEC" at 665,1160 h30 r270
  text "64" at 1305,1160 h30 r90
  text "DEC" at 1484.69,1042.24 h30 r90
  text "49" at 970,1025 h30 r90
  text "51 / 54 / 57 / 60 / 63" at 1270,923.61 h30 r90
  text "RoHS / PB-Free" at 250,880 h50 r270
  text "p" at 940,610 h250
  text "C" at 930,495 h250
  text "NewAE Technology Inc." at 415,320 h50 r270
  text "NAE-CW308T-STM32F-SOCKET-04" at 330,315 h50 r270
  text "W" at 845,245 h250
Mechanical 1:
  lines w10: 0,50 ccw(c50,50) 50,0 2010,0 ccw(c2010,50) 2060,50 2060,2490 ccw(c2010,2490) 2010,2540 160,2540 50,2540 ccw(c50,2490) 0,2490 0,50 ; 910,1280 ccw(c930,1280) 930,1260 1290,1260 ccw(c1290,1290) 1320,1290 1320,1640 ccw(c1290,1640) 1290,1670 930,1670 ccw(c930,1650) 910,1650 910,1280

## Dimensions
2060,-30 to 0,-30 on Drill Drawing
-30,0 to -45,2540 on Drill Drawing
-30,0 to -45,2540 on Drill Drawing
0,-40 to 2060,-40 on Drill Drawing